# Altium PCB PCB1.PcbDoc
Units mm, origin at the board's own origin, x right, y up, seen from the top; angles counter-clockwise.
Board outline 36 x 36 mm, 2 copper layers (Top Layer, Bottom Layer); 7 components, 25 nets, 81 pads, 66 vias.
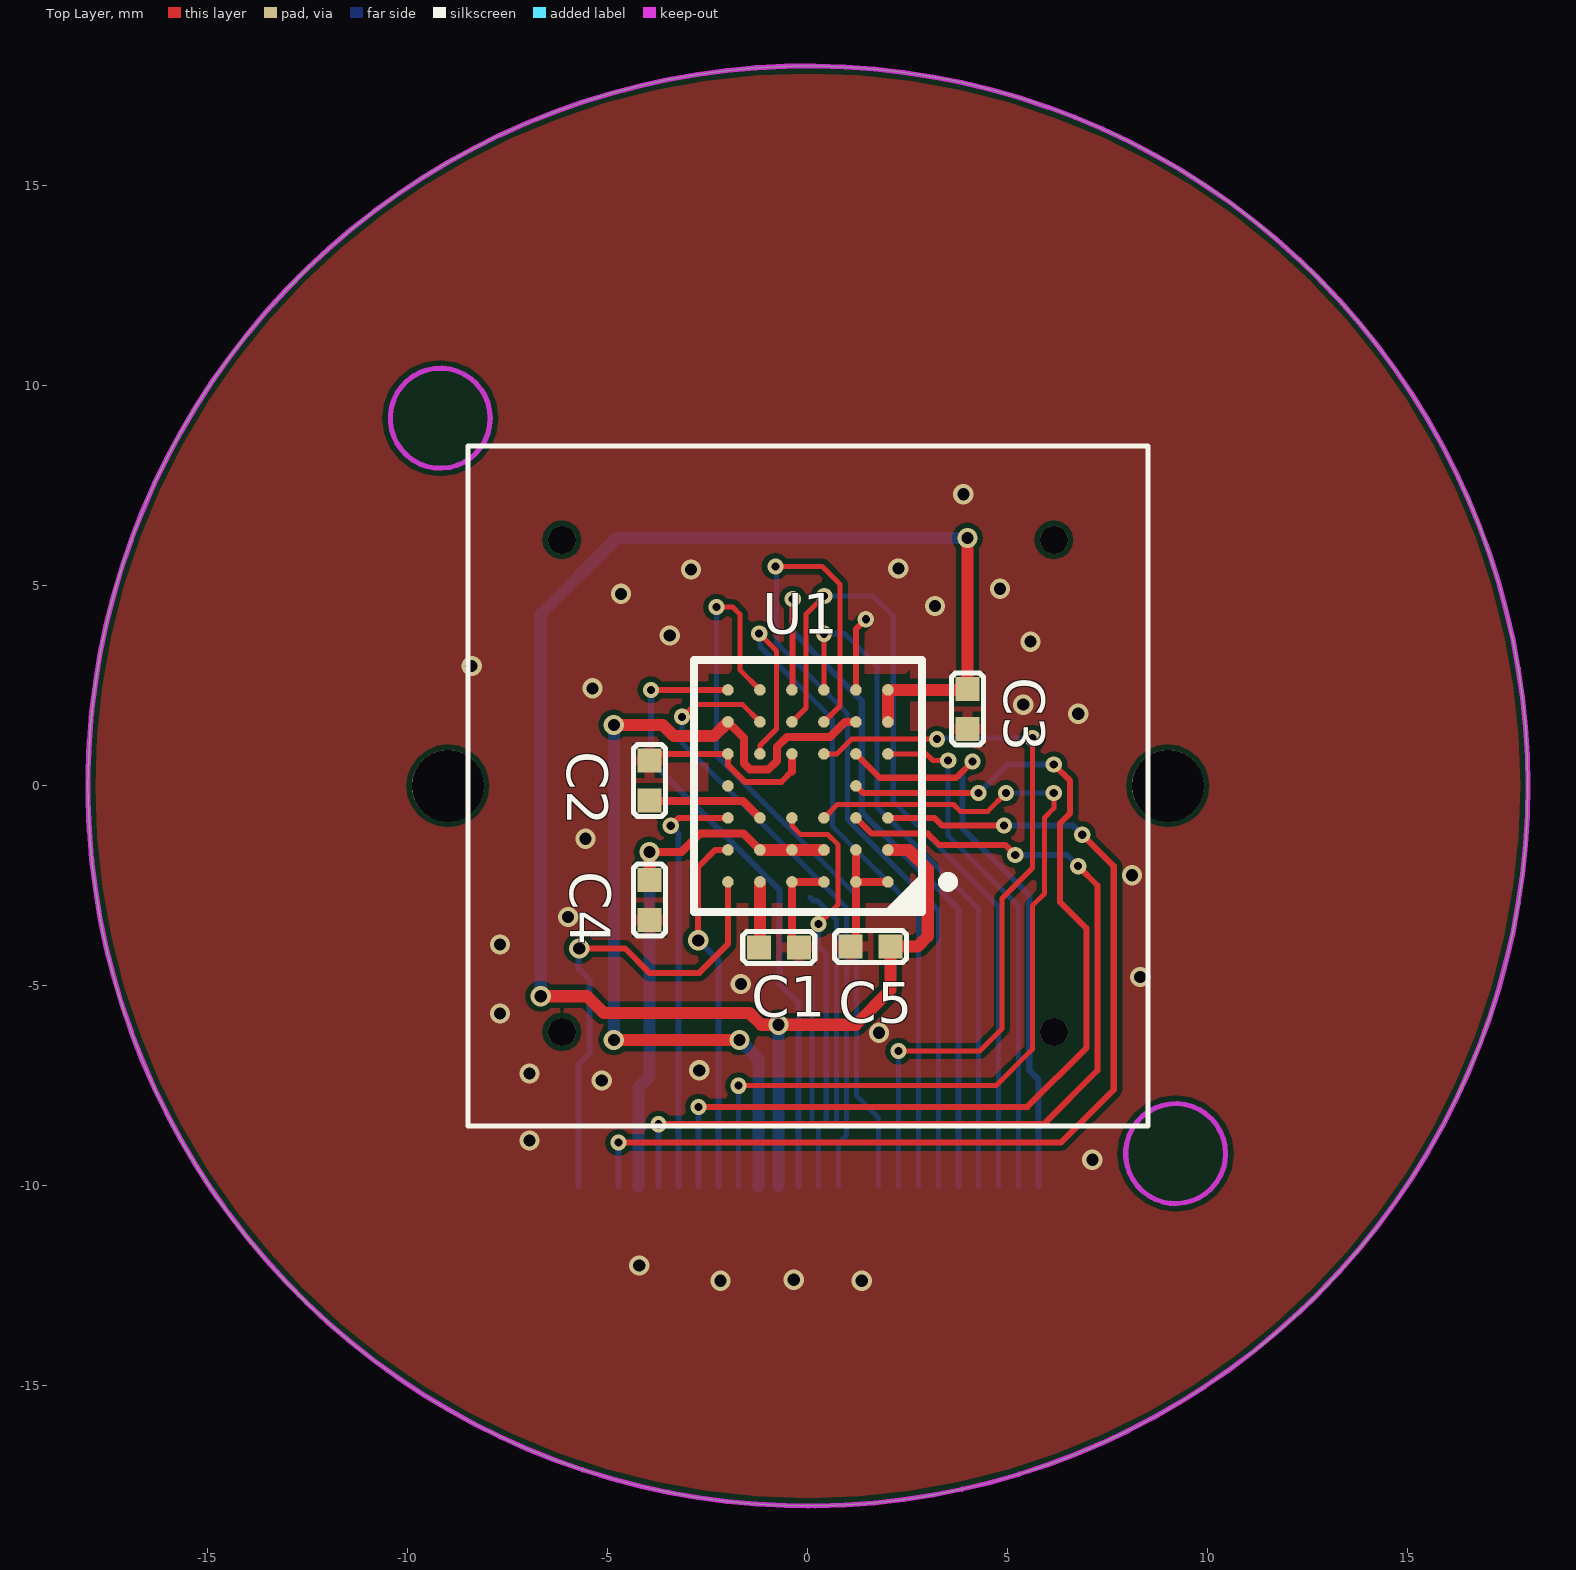
[diagram p0: Top Layer view]
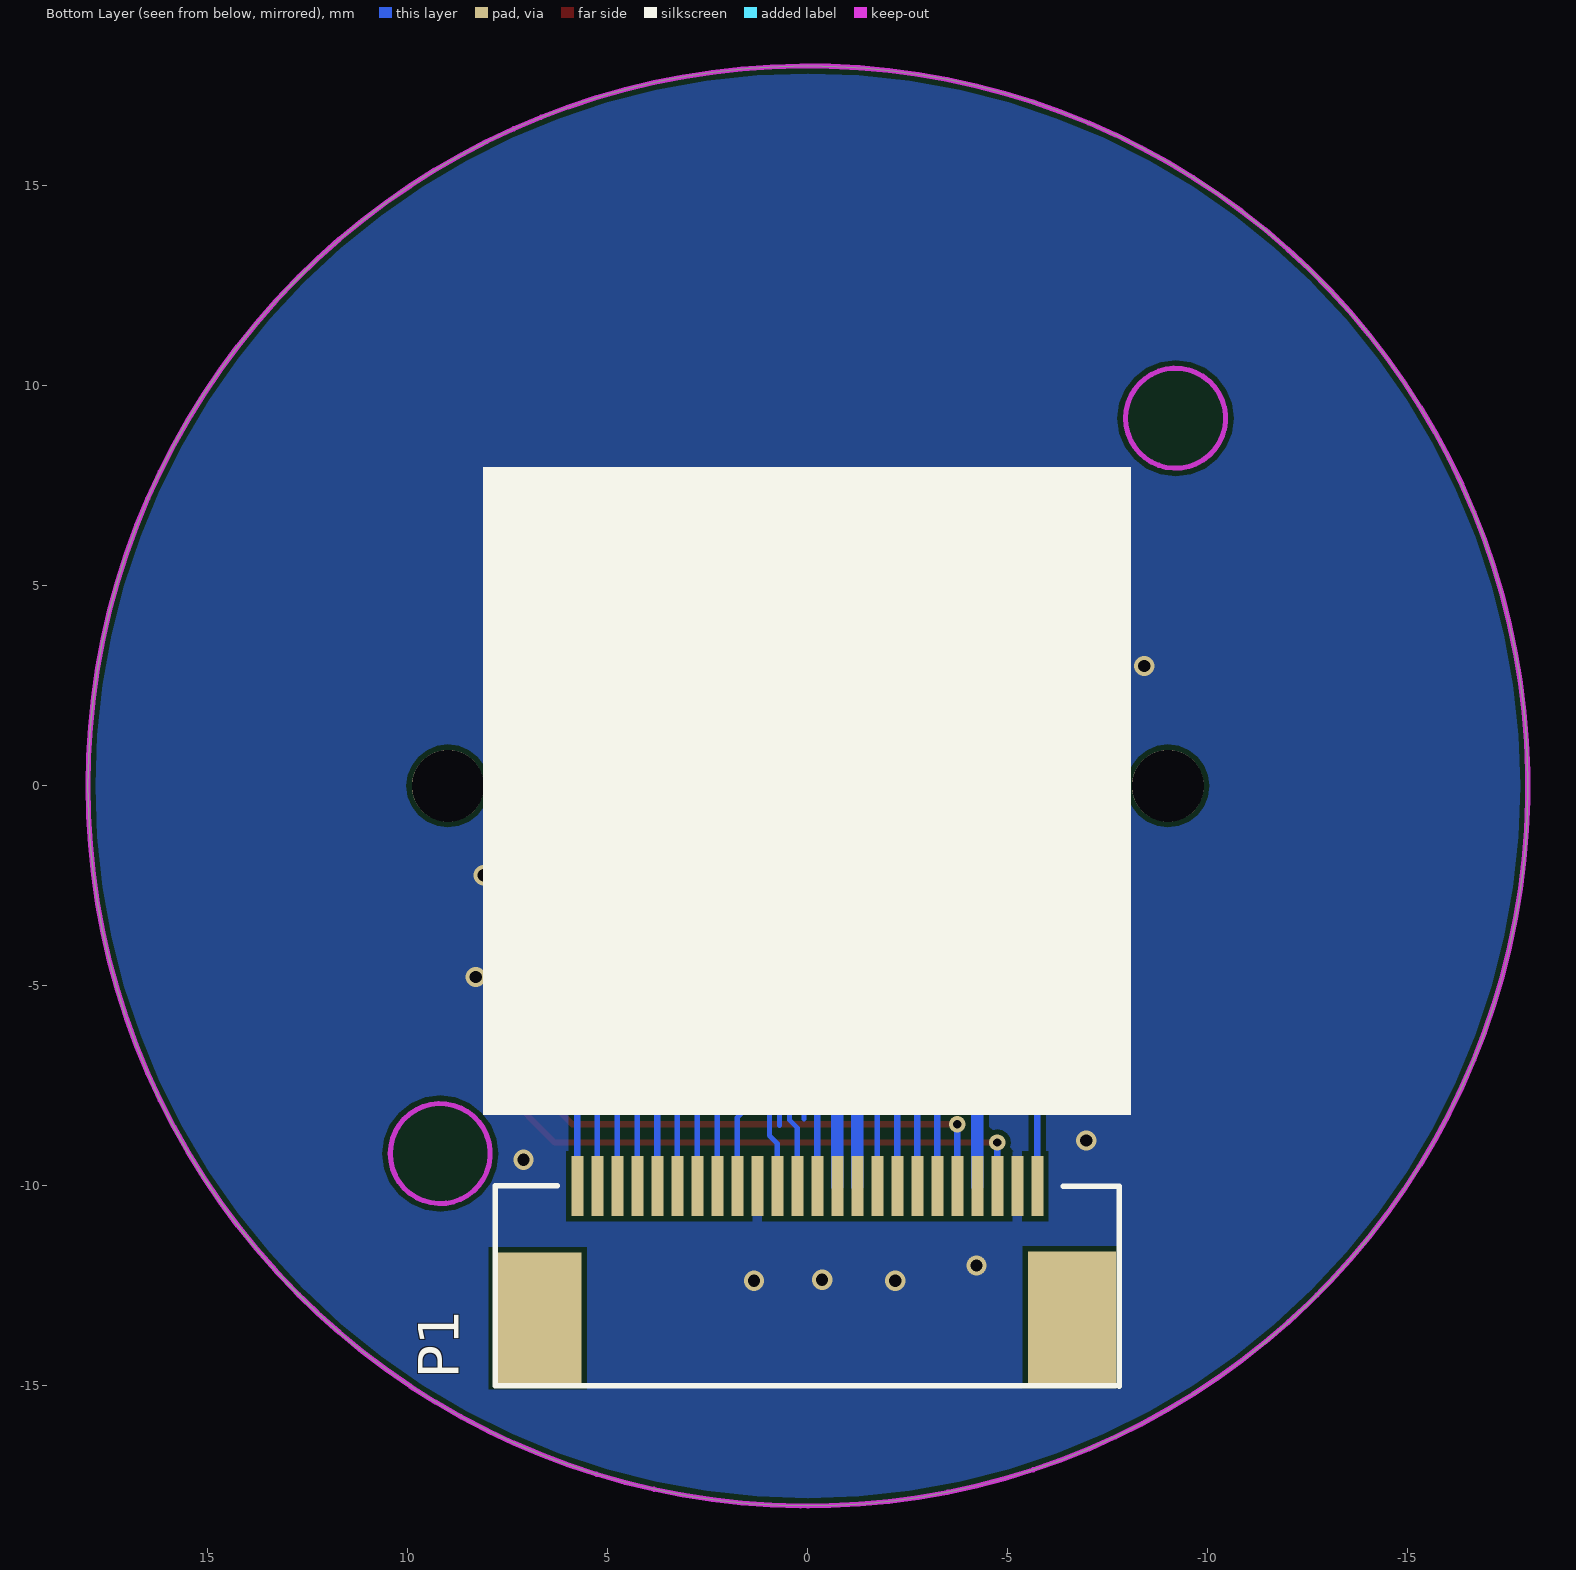
[diagram p1: Bottom Layer view, seen from below]

## Layer stack, top to bottom
Top Layer: signal copper 0.0356
Dielectric: dielectric 0.32, FR-4, Dk 4.8
Bottom Layer: signal copper 0.0356

## Board outline
-18,0 ccw(c0,0) 0,-18 ccw(c0,0) 18,0 ccw(c0,0) 0,18 ccw(c0,0)

## Design rules (kind name [scope] priority, off if disabled: settings)
Clearance [All] p1: gap=0.127
Clearance Clearance_1 [InPolygon And InNet(AGND)] p2: gap=0.381
MinimumSolderMaskSliver [All] p1: minsoldermaskwidth=0.025
PolygonConnect PolygonConnect_1 [IsVia] p1: connectstyle=Direct reliefconductorwidth=0.254 reliefentries=4 polygonreliefangle="90 Angle"
PolygonConnect [All] p2: connectstyle=Relief reliefconductorwidth=0.254 reliefentries=4 polygonreliefangle="90 Angle"
RoutingVias [All] p1: holewidth=0.711 width=1.27 viastyle="Through Hole" minholewidth=0.711 minwidth=1.27 maxholewidth=0.711 maxwidth=1.27
SilkToSilkClearance [All] p1: silktosilkclearance=0.025
SilkscreenOverComponentPads [All] p1: minsilkscreentomaskgap=0.025
SolderMaskExpansion [All] p1: expansion=0.102
Width [All] p1: maxlimit=5.08 minlimit=0.127 preferedwidth=0.254
25 further rules are at their usual default settings.

## Components (designator, comment, footprint, x,y, rotation, side; value= is the part's Value field where it differs from the comment)
C1 "0.1uF" 0402C -0.229,-4.039 r180 top
C2 "0.1uF" 0402C -3.962,0.635 r270 top
C3 "1uF" 0402C 3.988,1.422 r90 top
C4 "1uF" 0402C -3.962,-3.353 r90 top
C5 "1uF" 0402C 1.067,-4.013 r0 top
P1 "Header 24" FPC24PIN_0.5MM 5.766,-10.008 r90 bottom locked
U1 "ov2640" BGA100P9X9-81A 0,0 r180 top

## Footprints (in the part's own frame and the unit in brackets; to place one, negate y for a bottom-side part, rotate by r counter-clockwise, add the part's x,y. Pads: shape width x height; smd on the part's side, far side on the other; paste and mask are expansions set on the pad)
0402C [mm]
  rect 0.6x0.6 smd: 1(0,0) 2(1,0)
  silkscreen extent -0.4,-0.4 1.4,0.4
BGA100P9X9-81A [mm]
  round 0.29 smd: A1(-2,2.4) A2(-1.2,2.4) A3(-0.4,2.4) A4(0.4,2.4) A5(1.2,2.4) A6(2,2.4) B1(-2,1.6) B2(-1.2,1.6) B3(-0.4,1.6) B4(0.4,1.6) B5(1.2,1.6) B6(2,1.6) C1(-2,0.8) C2(-1.2,0.8) C3(-0.4,0.8) C4(0.4,0.8) C5(1.2,0.8) C6(2,0.8) D2(-1.2,0) D6(2,0) E1(-2,-0.8) E2(-1.2,-0.8) E3(-0.4,-0.8) E4(0.4,-0.8) E5(1.2,-0.8) E6(2,-0.8) F1(-2,-1.6) F2(-1.2,-1.6) F3(-0.4,-1.6) F4(0.4,-1.6) F5(1.2,-1.6) F6(2,-1.6) G1(-2,-2.4) G2(-1.2,-2.4) G3(-0.4,-2.4) G4(0.4,-2.4) G5(1.2,-2.4) G6(2,-2.4)
  silkscreen extent -3.63,-3.15 2.85,3.15
FPC24PIN_0.5MM [mm]
  rect 1.5x0.3 smd: 1(0,-11.5) 2(0,-11) 3(0,-10.5) 4(0,-10) 5(0,-9.5) 6(0,-9) 7(0,-8.5) 8(0,-8) 9(0,-7.5) 10(0,-7) 11(0,-6.5) 12(0,-6) 13(0,-5.5) 14(0,-5) 15(0,-4.5) 16(0,-4) 17(0,-3.5) 18(0,-3) 19(0,-2.5) 20(0,-2) 21(0,-1.5) 22(0,-1) 23(0,-0.5) 24(0,0)
  rect 3.3x2.2 smd: 25(-3.277,-12.37) 26(-3.302,0.991)
  round 0.5 on Bottom Overlay: ""(1.422,-11.557)
  silkscreen extent -5,-13.55 0.01,2.05

## Part data
C1 C2 C3 C4 C5: library part 0.01UF, "CCX85-103"
P1: "Header, 24-Pin"

## Free pads (board coordinates)
  round 1.8 hole 1.8 unplated: 0(-9,0) 0(9,0)
  round 0.7 hole 0.7 unplated: 0(6.15,6.15) 1(-6.15,6.15) 2(6.15,-6.15) 3(-6.15,-6.15)

## Via types
v1: diameter 0.508, hole 0.305, Top Layer to Bottom Layer, tented both sides, 38 vias
v2: diameter 0.406, hole 0.203, Top Layer to Bottom Layer, tented both sides, 28 vias

## Nets (pads, with @x,y where several pads share a name; then routed paths per layer and width w, separated by ;. In a path a pad name is that pad's centre, name@x,y a point inside that pad or via, vN(x,y) a via of type N, cw(c..) or ccw(c..) an arc to the next point about the centre after c; other vN are vias at no path point)
AGND: C1.1 C2.1 C3.1 C4.1 C5.1 P1.2 P1.15 U1.A1 U1.A2 U1.A3 U1.A4 U1.B2 U1.E4 U1.E6 U1.G2 | length 21.8
  Top Layer w0.152: C2.1 -3.797,0.8 U1.E6 -2,0.528 -1.574,0.102 -0.66,0.102 -0.4,0.362 ; U1.G2 1.2,3.918 v2(1.448,4.166)
  Top Layer w0.203: -0.4,0.362 U1.E4 ; C1.1 -0.4,-3.867 U1.A4 U1.A3 ; C5.1 1.2,-3.88 U1.A2 ; U1.B2 U1.A2 ; U1.A1 U1.A2
  Bottom Layer w0.127: 0,-4.851 0.102,-4.953 0.102,-8.331 ; 0.059,-2.796 0.133,-2.87 0.238,-2.87 0.711,-3.343 0.711,-8.484
  other v1: -2.184,-12.37 1.346,-12.37 -0.356,-12.344 -4.216,-11.989 7.112,-9.347 -6.96,-8.865 -5.156,-7.366 -6.96,-7.188 -2.718,-7.112 1.778,-6.172 -7.696,-5.69 -1.676,-4.953 8.306,-4.775 -7.696,-3.962 -5.994,-3.277 8.103,-2.235 -5.563,-1.321 6.756,1.803 5.385,2.032 -5.385,2.438 -8.407,2.997 5.563,3.607 -3.454,3.759 3.175,4.496 -4.674,4.801 4.801,4.928 -2.921,5.41 2.261,5.436 3.886,7.29
CAM_RESET: P1.6 U1.C6 | length 10.6
  Top Layer w0.152: v2(-3.43,-0.997) -3.233,-0.8 U1.C6
  Bottom Layer w0.152: v2(-3.43,-0.997) -3.234,-1.193 P1.6
CAM_STROBE: P1.1 U1.A6 | length 12
  Top Layer w0.152: v1(-5.715,-4.064) -4.572,-4.064 -3.962,-4.674 -2.718,-4.674 -2,-3.956 U1.A6
  Bottom Layer w0.152: P1.1 -5.734,-6.96 -5.461,-6.686 -5.461,-4.845 -5.734,-4.572 -5.734,-4.083 v1(-5.715,-4.064)
DVP_HREF: P1.9 U1.C3 | length 23.1
  Top Layer w0.127: v2(-1.734,-7.493) 4.699,-7.493 5.609,-6.583 5.609,-2.997 5.918,-2.688 5.918,-0.787 6.147,-0.559 v2(6.147,-0.178) ; U1.C3 0.736,-0.464 3.208,-0.464 ; 3.302,-0.464 3.208,-0.464 ; v2(4.953,-0.178) 4.496,-0.635 3.81,-0.635 3.639,-0.464 3.208,-0.464
  Bottom Layer w0.127: P1.9 v2(-1.734,-7.493) ; v2(4.953,-0.178) v2(6.147,-0.178)
DVP_PCLK: P1.17 U1.E3 | length 19.4
  Top Layer w0.127: U1.E3 0.724,0.8 1.092,1.168 v2(3.226,1.168) ; v2(2.266,-6.629) 4.293,-6.629 4.851,-6.071 4.851,-2.815 5.613,-2.053 5.613,0.711 ; 5.613,0.914 5.613,0.711 ; v2(5.613,1.194) 5.613,0.711
  Bottom Layer w0.127: P1.17 v2(2.266,-6.629) ; v2(3.226,1.168) 3.251,1.194 v2(5.613,1.194)
DVP_VSYNC: P1.7 U1.D2 | length 25.2
  Top Layer w0.152: v2(-2.734,-8.026) 5.486,-8.026 6.96,-6.553 6.96,-3.556 6.299,-2.896 6.299,-0.94 6.553,-0.686 6.553,0.127 v2(6.147,0.533) ; U1.D2 1.378,-0.178 v2(4.267,-0.178)
  Bottom Layer w0.152: P1.7 v2(-2.734,-8.026) ; v2(4.267,-0.178) 4.978,0.533 v2(6.147,0.533)
DVP_Y0: P1.24 U1.E2 | length 14.8
  Top Layer w0.152: U1.E2 1.797,0.203 3.708,0.203 v2(4.115,0.61)
  Bottom Layer w0.152: v2(4.115,0.61) 3.861,0.356 3.861,-1.061 5.532,-2.732 5.532,-7.107 5.766,-7.341 P1.24
DVP_Y1: P1.23 U1.E1 | length 12.9
  Top Layer w0.127: U1.E1 2.959,0.8 3.124,0.635 v2(3.505,0.635)
  Bottom Layer w0.127: v2(3.505,0.635) 3.505,-1.245 5.266,-3.005 P1.23
DVP_Y2: P1.19 U1.F3 | length 22.6
  Top Layer w0.127: v2(-0.813,5.486) 0.356,5.486 0.8,5.042 0.8,2 U1.F3
  Bottom Layer w0.127: v2(-0.813,5.486) -0.787,5.461 -0.787,4.064 -0.787,3.581 0.991,1.803 0.991,-0.838 3.266,-3.113 P1.19
DVP_Y3: P1.21 U1.G3 | length 17.1
  Top Layer w0.127: U1.G3 v2(0.4,3.804)
  Bottom Layer w0.127: v2(0.4,3.804) 0.921,3.804 1.727,2.997 1.727,-0.527 4.266,-3.066 P1.21
DVP_Y4: P1.22 U1.F4 | length 20.8
  Top Layer w0.127: U1.F4 -0.051,1.949 -0.051,4.293 v2(0.406,4.75)
  Bottom Layer w0.127: v2(0.406,4.75) 1.626,4.75 2.134,4.242 2.134,-0.381 4.766,-3.013 P1.22
DVP_Y5: P1.20 U1.G4 | length 18.7
  Top Layer w0.152: U1.G4 -0.381,2.419 v2(-0.381,4.674) v2@-0.4,4.655
  Bottom Layer w0.152: v2(-0.381,4.674) -0.381,3.861 1.346,2.134 1.346,-0.66 3.766,-3.08 P1.20
DVP_Y6: P1.18 U1.E5 | length 18.8
  Top Layer w0.127: v2(-1.219,3.81) -0.787,3.378 -0.787,1.422 -1.2,1.01 U1.E5
  Bottom Layer w0.127: v2(-1.219,3.81) -1.2,3.791 -1.2,3.486 0.61,1.676 0.61,-1.01 2.766,-3.166 P1.18
DVP_Y7: P1.16 U1.G5 | length 19.3
  Top Layer w0.127: v2(-2.286,4.47) -1.88,4.47 -1.702,4.293 -1.702,2.902 U1.G5
  Bottom Layer w0.127: -2.286,3.15 -2.286,2.794 ; v2(-2.286,4.47) -2.286,2.794 ; P1.16 1.766,-8.294 1.219,-7.747 1.219,-2.743 -2.286,0.762 -2.286,2.794
DVP_Y8: P1.14 U1.F5 | length 15.8
  Top Layer w0.127: v2(-3.15,1.727) -2.845,2.032 -1.632,2.032 U1.F5
  Bottom Layer w0.127: v2(-3.15,1.727) -3.15,1.067 0.965,-3.048 0.965,-8.741 0.766,-8.941 P1.14
DVP_Y9: P1.12 U1.G6 | length 15.9
  Top Layer w0.152: v2(-3.924,2.4) U1.G6
  Bottom Layer w0.152: v2(-3.924,2.4) -3.924,0.622 -0.711,-2.591 -0.711,-4.959 -0.234,-5.436 P1.12
I2C_SCL: P1.5 U1.C2 | length 24.4
  Top Layer w0.152: v2(-3.734,-8.458) 5.893,-8.458 7.239,-7.112 7.239,-2.489 v2(6.756,-2.007) ; U1.C2 1.594,-1.194 2.997,-1.194 3.277,-1.473 4.928,-1.473 v2(5.182,-1.727)
  Bottom Layer w0.152: P1.5 v2(-3.734,-8.458) ; v2(5.182,-1.727) 6.477,-1.727 v2(6.756,-2.007)
I2C_SDA: P1.3 U1.C1 | length 25.8
  Top Layer w0.152: v2(-4.734,-8.915) 6.325,-8.915 7.645,-7.595 7.645,-2.007 v2(6.858,-1.219) ; U1.C1 3.162,-0.8 3.353,-0.991 v2(4.902,-0.991)
  Bottom Layer w0.152: P1.3 v2(-4.734,-8.915) ; v2(4.902,-0.991) 6.629,-0.991 v2(6.858,-1.219)
NetC1_2: C1.2 U1.A5 | length 1.7
  Top Layer w0.305: C1.2 -1.2,-4.01 U1.A5
NetC2_2: C2.2 U1.C5 | length 2.9
  Top Layer w0.203: C2.2 -3.954,-0.374 -1.626,-0.374 U1.C5
PWDN: P1.8 U1.B6 | length 9.1
  Top Layer w0.152: v1(-2.743,-3.861) -2.743,-2.027 -2.316,-1.6 U1.B6
  Bottom Layer w0.152: v1(-2.743,-3.861) -2.234,-4.37 P1.8
VCC_1.3V: P1.10 U1.F2 U1.F6 | length 23.6
  Top Layer w0.203: U1.F6 -1.6,1.2 -1.6,0.559 -1.448,0.406 -0.991,0.406 -0.774,0.623 -0.774,0.979 -0.526,1.226 0.555,1.226 0.928,1.6 U1.F2
  Top Layer w0.305: v1(-4.851,-6.35) -3.285,-6.35 v1@-1.727,-6.35 ; v1(-4.851,1.524) -3.629,1.524 -3.349,1.245 -2.355,1.245 U1.F6
  Bottom Layer w0.305: v1(-4.851,-6.35) -4.851,-5.105 ; -4.851,-5.918 -4.851,-5.105 ; v1(-4.851,1.524) -4.851,-5.105 ; v1@-1.727,-6.35 v1(-1.712,-6.35) -1.234,-6.828 P1.10
VCC_2.8V: C4.2 P1.4 U1.B3 U1.B4 U1.B5 | length 13.9
  Top Layer w0.203: v1(-3.962,-1.651) -3.158,-1.651 -2.701,-1.194 -1.606,-1.194 U1.B5
  Top Layer w0.305: C4.2 v1(-3.962,-1.651) ; U1.B5 U1.B4 U1.B3
  Bottom Layer w0.305: P1.4 -4.234,-7.536 -3.962,-7.264 v1(-3.962,-1.651)
VCC_3.3V: C3.2 C5.2 P1.11 U1.B1 U1.F1 U1.G1 | length 46
  Top Layer w0.305: v1(-6.68,-5.258) -5.524,-5.258 -5.105,-5.677 -1.46,-5.677 -1.168,-5.969 v1(-0.737,-5.969) 1.194,-5.969 2.067,-5.096 C5.2 2.743,-4.013 2.997,-3.759 2.997,-2.083 2.514,-1.6 U1.B1 ; U1.F1 U1.G1 3.965,2.4 C3.2 v1(3.988,6.198)
  Bottom Layer w0.305: v1(-6.68,-5.258) -6.68,4.293 -4.775,6.198 v1(3.988,6.198) ; P1.11 v1@-0.734,-5.969
XMCLK: P1.13 U1.C4 | length 10.4
  Top Layer w0.127: U1.C4 -0.4,-0.997 -0.178,-1.219 0.504,-1.219 0.756,-1.471 0.756,-2.965 v2(0.266,-3.454)
  Bottom Layer w0.127: P1.13 0.266,-8.548 0.457,-8.357 0.457,-4.205 0.266,-4.013 v2(0.266,-3.454)
pads on no net: P1. P1.25 P1.26 U1.D6

## Polygon pours and split planes (outlines as drawn)
AGND on Bottom Layer "Mid-Layer 1-No Net" (solid, remove dead copper, pour order 1000): 18.034,19.812 17.907,19.939 -14.122,19.939 -14.122,18.593 -22.149,10.566 -19.761,8.179 -19.761,-9.195 -19.761,-9.601 -10.592,-18.771 -9.576,-19.787 11.074,-19.787 11.201,-19.787 19.025,-11.963 18.034,-10.973 18.034,19.812
AGND on Top Layer "Mid-Layer 1-No Net" (solid, remove dead copper, pour order 1001): 21.717,18.999 21.463,18.745 -20.244,18.745 -20.244,-17.45 -19.71,-17.983 -16.891,-20.803 -2.718,-20.803 12.243,-20.803 17.755,-15.291 21.158,-11.887 21.158,18.999

## Keep-outs
Keep-Out Layer:
  circle w0.127: c9.192,-9.192 r1.25
  circle w0.127: c-9.192,9.192 r1.25
  circle w0.064: c18,0 r0.032
  circle w0.064: c12.728,-12.728 r0.032
  circle w0.064: c0,-18 r0.032
  circle w0.064: c-12.728,-12.728 r0.032
  circle w0.064: c-18,0 r0.032
  circle w0.064: c-12.728,12.728 r0.032
  circle w0.064: c0,18 r0.032
  circle w0.064: c12.728,12.728 r0.032
  circle w0.127: c0,0 r18

## Other copper
Top Layer:
  pour cut-out: 2.54,2.896 2.438,2.794 -2.48,2.794 -2.48,-2.854 -2.413,-2.921 2.434,-2.921 2.712,-2.642 2.54,-2.47

## Silkscreen, mask and mechanical layers (free items; w line width, h text height)
Top Overlay:
  lines w0.127: -8.5,-8.5 -8.5,8.5 8.5,8.5 8.5,-8.5 -8.5,-8.5
Bottom Overlay:
  rectangle: -8.077,-8.23 8.128,7.976
Mechanical 1:
  circle w0.127: c9.192,-9.192 r1.25
  circle w0.127: c-9.192,9.192 r1.25
  circle w0.064: c18,0 r0.032
  circle w0.064: c12.728,-12.728 r0.032
  circle w0.064: c0,-18 r0.032
  circle w0.064: c-12.728,-12.728 r0.032
  circle w0.064: c-18,0 r0.032
  circle w0.064: c-12.728,12.728 r0.032
  circle w0.064: c0,18 r0.032
  circle w0.064: c12.728,12.728 r0.032
  circle w0.127: c0,0 r18